# Altium PCB PCB_AIRPURE_2021-03-10.pcbdoc
Units mil, origin at the board's own origin, x right, y up, seen from the top; angles counter-clockwise.
Board outline 4947.01 x 4947.01 mil, 2 copper layers (Top Layer, Bottom Layer); 17 components, 13 nets, 107 pads, 2 vias.
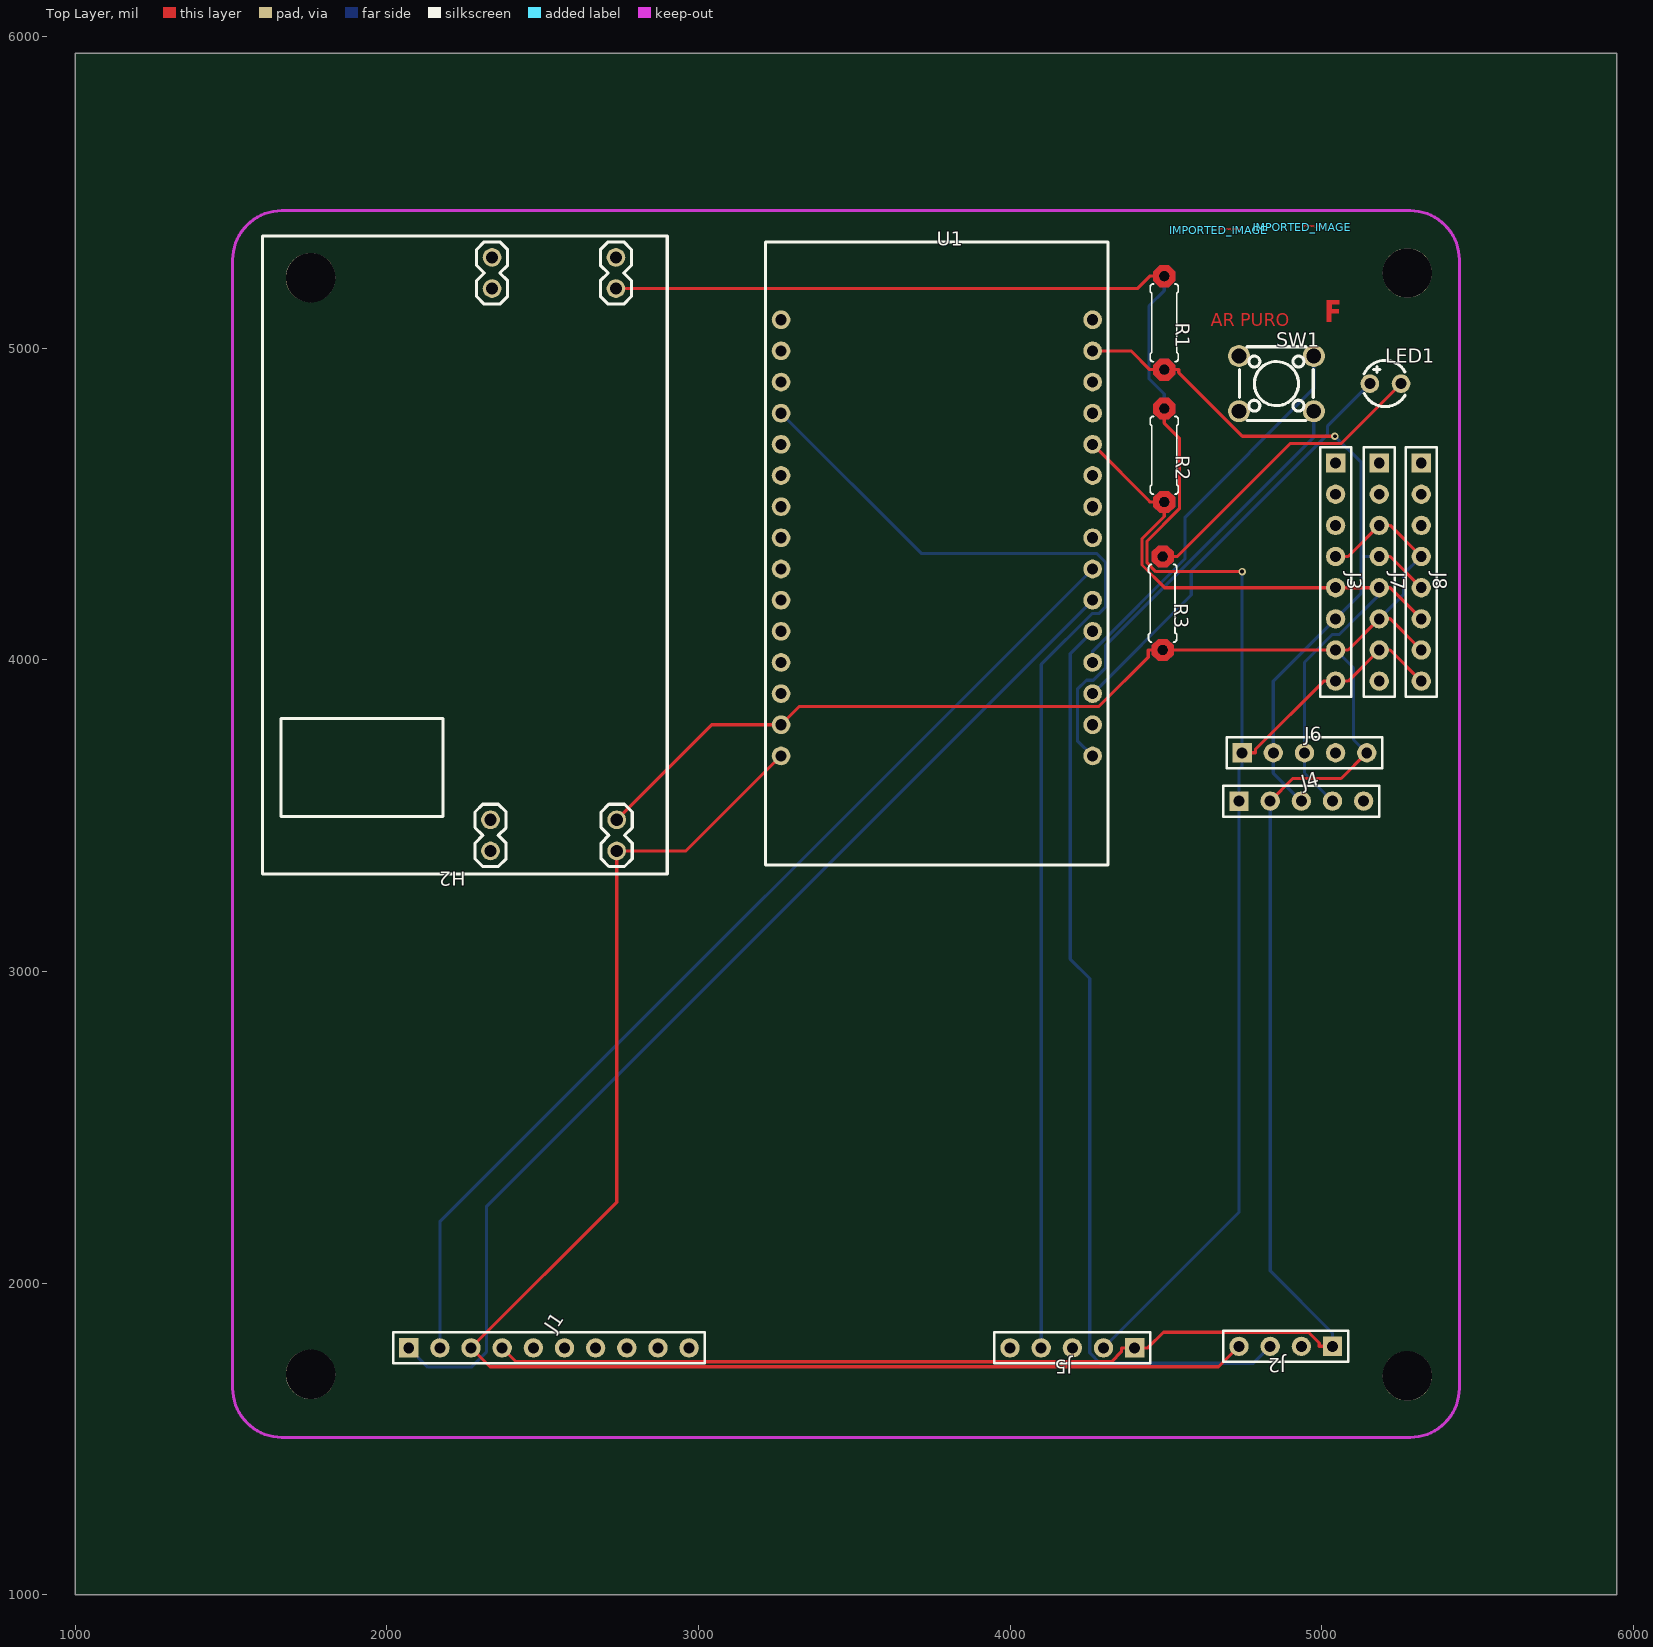
[diagram p0: Top Layer view]
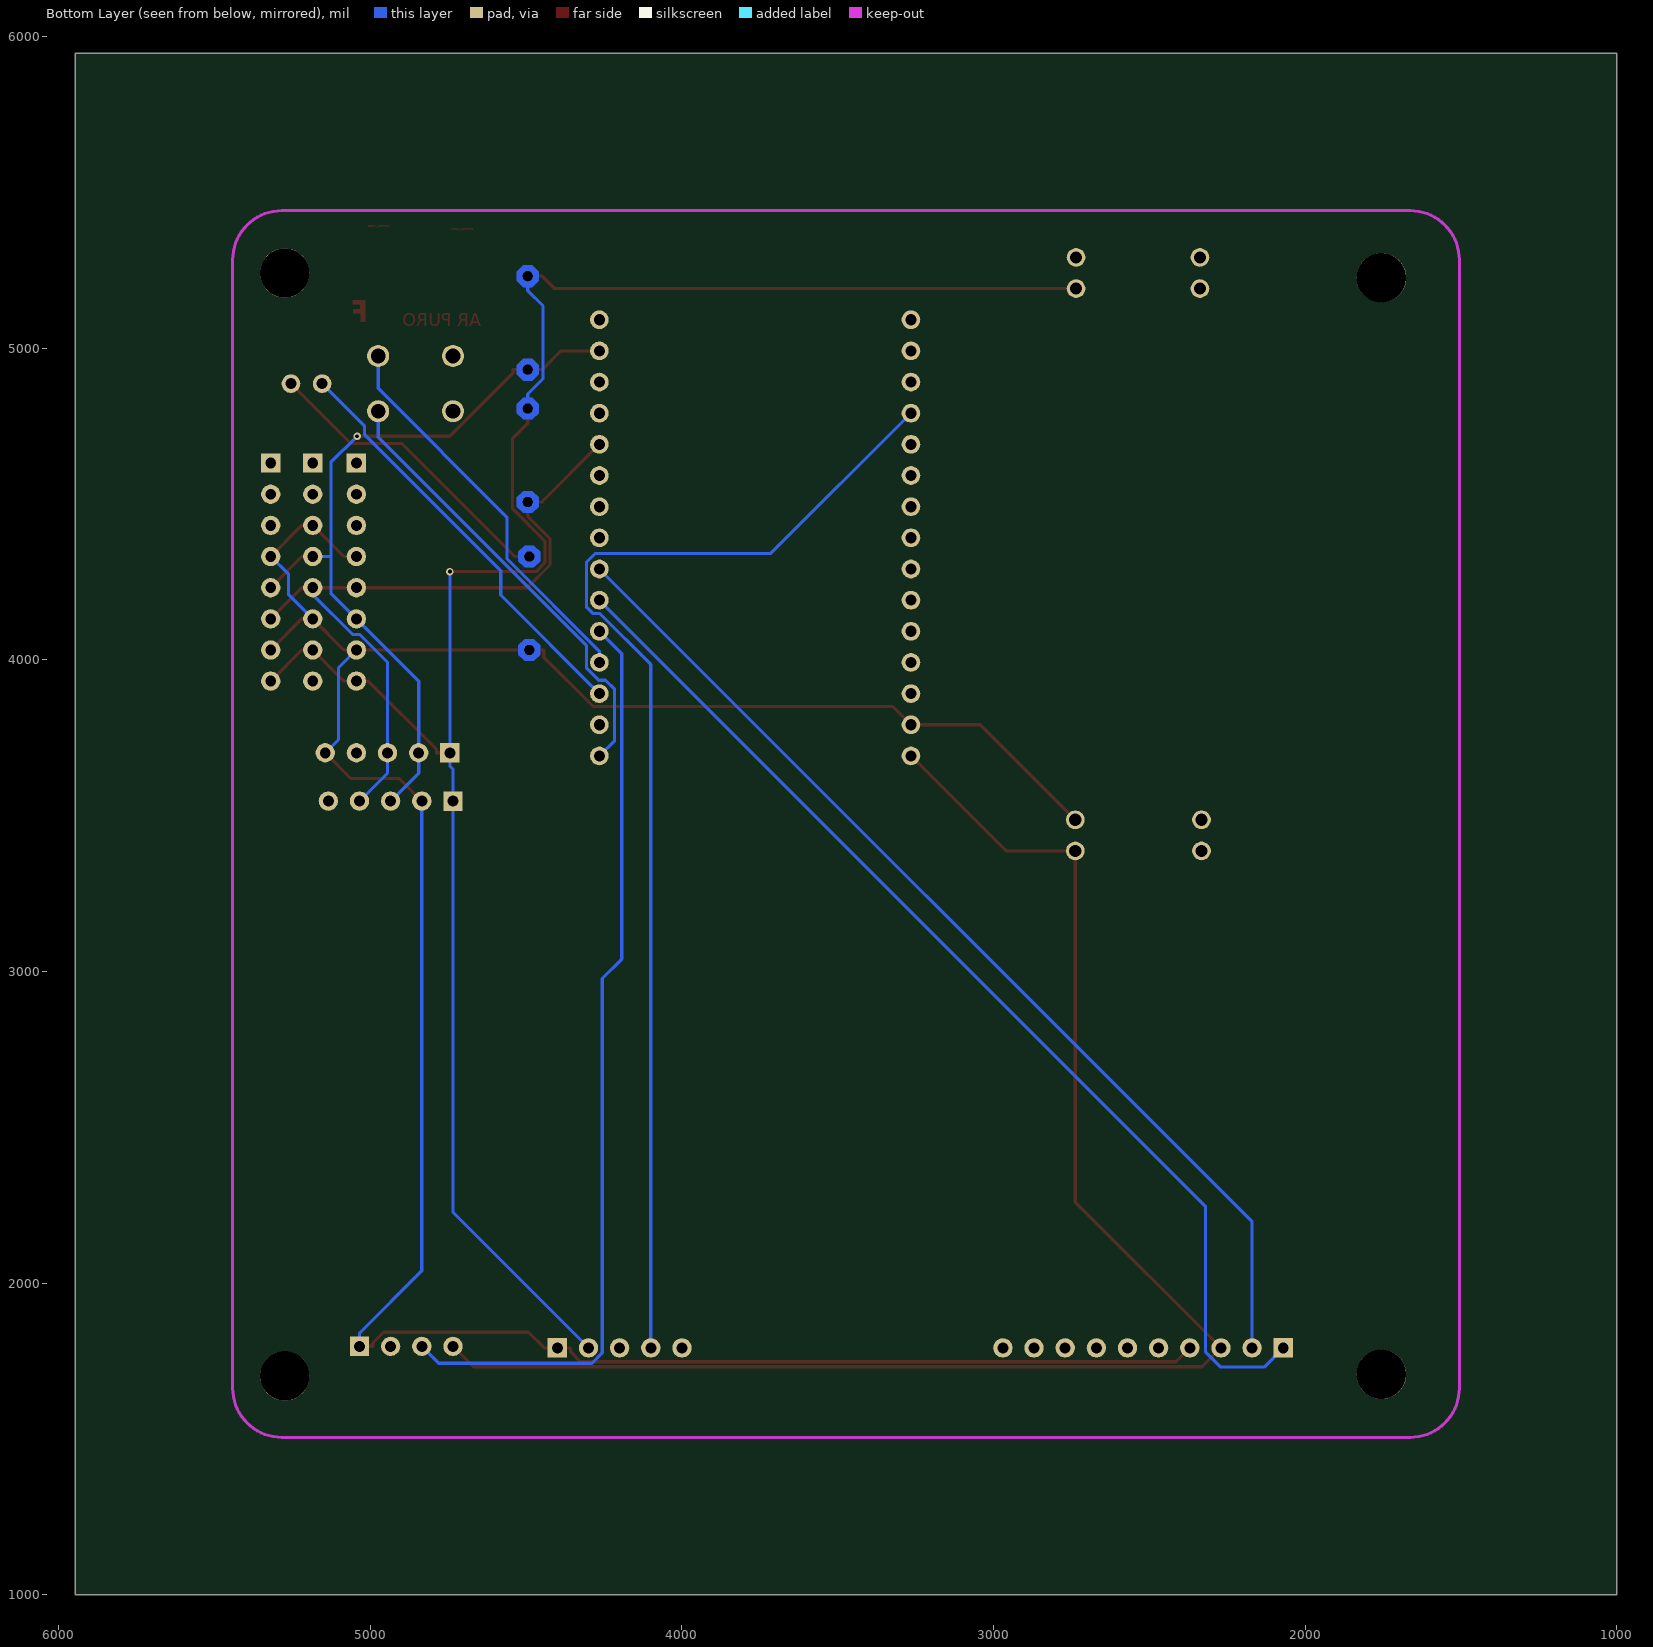
[diagram p1: Bottom Layer view, seen from below]

## Layer stack, top to bottom
Top Layer: signal copper (thickness not stored)
Dielectric: dielectric 12.6, FR-4, Dk 4.8
Bottom Layer: signal copper (thickness not stored)

## Board outline
5947.01,1000 1000,1000 1000,5947.01 5947.01,5947.01

## Components (designator, comment, footprint, x,y, rotation, side; value= is the part's Value field where it differs from the comment)
H2 "YwRobotPowerSupply" YWROBOT/545043 2635,3637.01 r180 top
IMPORTED_IMAGE "IMPORTED_IMAGE" IMPORTED_IMAGE#1 4669.69,5379.67 r0 top
IMPORTED_IMAGE "IMPORTED_IMAGE" IMPORTED_IMAGE#2 4938.68,5388.2 r0 top
J1 "HDR-M-2.54_1x10" HDR-M-2.54_1X10 2520,1792.01 r0 top
J2 "HDR-M-2.54_1x4" HDR-M-2.54_1X4 4885,1797.01 r180 top
J3 "HDR-M-2.54_1x8" HDR-M-2.54_1X8 5045,4232.01 r270 top
J4 "HDR-M-2.54_1x5" HDR-M-2.54_1X5 4935,3547.01 r0 top
J5 "HDR-M-2.54_1x5" HDR-M-2.54_1X5 4200,1792.01 r180 top
J6 "HDR-M-2.54_1x5" HDR-M-2.54_1X5 4945,3702.01 r0 top
J7 "HDR-M-2.54_1x8" HDR-M-2.54_1X8 5185,4232.01 r270 top
J8 "HDR-M-2.54_1x8" HDR-M-2.54_1X8 5320,4232.01 r270 top
LED1 "LED" LED-TH_BD3.8-P2.54-FD 5205,4887.01 r0 top
R1 "10K" RESISTOR_7.5MM_PTH 4495,5232.01 r270 top
R2 "10K" RESISTOR_7.5MM_PTH 4495,4807.01 r270 top
R3 "220" RESISTOR_7.5MM_PTH 4490,4332.01 r270 top
SW1 "Button-6x6x6mm" SW-TH_4P-L6.0-W6.0-P4.50-LS6.1 4855,4887.01 r0 top
U1 "ESP32 DEVKIT" ESP32_DEVKIT_MELIFE 3215,3342.01 r0 top

## Footprints (in the part's own frame and the unit in brackets; to place one, negate y for a bottom-side part, rotate by r counter-clockwise, add the part's x,y. Pads: shape width x height; smd on the part's side, far side on the other; paste and mask are expansions set on the pad)
ESP32_DEVKIT_MELIFE [mil]
  round 60 hole 36: 1(50,350) 2(50,450) 3(50,550) 4(50,650) 5(50,750) 6(50,850) 7(50,950) 8(50,1050) 9(50,1150) 10(50,1250) 11(50,1350) 12(50,1450) 13(50,1550) 14(50,1650) 15(50,1750) 16(1050,350) 17(1050,450) 18(1050,550) 19(1050,650) 20(1050,750) 21(1050,850) 22(1050,950) 23(1050,1050) 24(1050,1150) 25(1050,1250) 26(1050,1350) 27(1050,1450) 28(1050,1550) 29(1050,1650) 30(1050,1750)
  silkscreen extent 0,0 1100,2000
HDR-M-2.54_1X4 [mil]
  rect 62x62 hole 35: 1(-150,0)
  round 62 hole 35: 2(-50,0) 3(50,0) 4(150,0)
  silkscreen extent -200,-50 200,50
HDR-M-2.54_1X5 [mil]
  rect 62x62 hole 35: 1(-200,0)
  round 62 hole 35: 2(-100,0) 3(0,0) 4(100,0) 5(200,0)
  silkscreen extent -250,-50 250,50
HDR-M-2.54_1X8 [mil]
  rect 62x62 hole 35: 1(-400,0)
  round 62 hole 35: 2(-300,0) 3(-200,0) 4(-100,0) 5(0,0) 6(100,0) 7(200,0) 8(300,0)
  silkscreen extent -450,-50 350,50
HDR-M-2.54_1X10 [mil]
  rect 62x62 hole 35: 1(-450,0)
  round 62 hole 35: 2(-350,0) 3(-250,0) 4(-150,0) 5(-50,0) 6(50,0) 7(150,0) 8(250,0) 9(350,0) 10(450,0)
  silkscreen extent -500,-50 500,50
IMPORTED_IMAGE#1 [mil]
IMPORTED_IMAGE#2 [mil]
  Top Layer region: 92.62,-288.42 92.62,-301.97 77.96,-301.97 77.96,-234.23 117.94,-234.23 117.94,-246.32 93.29,-247.1 93.29,-262 116.61,-262.79 116.61,-274.87 92.62,-274.87
LED-TH_BD3.8-P2.54-FD [mil]
  round 60 hole 35.43: 1(-50,0) 2(50,0)
  silkscreen extent -68,-74 63,74
RESISTOR_7.5MM_PTH [mil]
  round 0 hole 31.5 slot 31.7 at 0 deg: 1(0,0) 2(300,0)
  Top Layer region: 35.11,14.54 14.54,35.11 -14.54,35.11 -35.11,14.54 -35.11,-14.54 -14.54,-35.11 14.54,-35.11 35.11,-14.54
  Top Layer region: 335.11,14.54 314.54,35.11 285.46,35.11 264.89,14.54 264.89,-14.54 285.46,-35.11 314.54,-35.11 335.11,-14.54
  Bottom Layer region: 35.11,14.54 14.54,35.11 -14.54,35.11 -35.11,14.54 -35.11,-14.54 -14.54,-35.11 14.54,-35.11 35.11,-14.54
  Bottom Layer region: 335.11,14.54 314.54,35.11 285.46,35.11 264.89,14.54 264.89,-14.54 285.46,-35.11 314.54,-35.11 335.11,-14.54
  silkscreen extent 25,-45 275,45
SW-TH_4P-L6.0-W6.0-P4.50-LS6.1 [mm]
  round 1.8 hole 1.2: 1(-3.05,2.25) 2(3.05,2.25) 3(-3.05,-2.25) 4(3.05,-2.25)
  silkscreen extent -3,-3 3,3
YWROBOT/545043 [mil]
  round 60 hole 39.37: 1(-102.5,250) 2(-102.5,150) 3(302.5,250) 4(302.5,150) 5(-100,-1555) 6(-100,-1655) 7(297.5,-1555) 8(297.5,-1655)
  silkscreen extent -265,-1724 1035,324

## Free pads (board coordinates)
  round 158.74 hole 158.74 unplated: ""(1755,1707.01) ""(1755,5227.01) ""(5275,1702.01) ""(5275,5242.01)

## Via types
v1: diameter 24.02, hole 12.2, Top Layer to Bottom Layer, 2 vias

## Nets (pads, with @x,y where several pads share a name; then routed paths per layer and width w, separated by ;. In a path a pad name is that pad's centre, name@x,y a point inside that pad or via, vN(x,y) a via of type N, cw(c..) or ccw(c..) an arc to the next point about the centre after c; other vN are vias at no path point)
3.3V: H2.5 J3.8 J4.1 J5.2 J6.1 J7.7 J8.8 R1.1 R2.1 | length 6552.3
  Top Layer w10.24: H2.5 4408.4,5192.01 4448.4,5232.01 R1.1 ; R2.1 4495,4760.41 4543.6,4711.81 4543.6,4485.41 4440.1,4381.91 4440.1,4311.61 4468,4283.61 v1(4745,4283.61) ; J6.1 4787.5,3702.01 4787.5,3712.61 5006.9,3932.01 J3.8 5085,3932.01 J7.7 5220,4032.01 J8.8
  Bottom Layer w10.24: J5.2 4735,2227.01 J4.1 4735,3649.51 4745,3659.51 4745,3680.71 J6.1 v1(4745,4283.61) ; R2.1 4495,4853.61 4446,4902.61 4446,5136.41 4495,5185.41 R1.1
5V: H2.1 J1.3 J2.4 U1.1 | length 4959.9
  Top Layer w10.24: U1.1 2960,3387.01 H2.1 2737.5,2259.51 J1.3 2330.8,1731.21 4669.2,1731.21 J2.4
33V: SW1.4 U1.16 | length 1453.7
  Bottom Layer w10.24: U1.16 4216.3,3740.71 4216.3,3905.91 4245.4,3935.11 4267.4,3935.11 4306.8,3974.61 4306.8,4046.91 4975.1,4715.11 SW1.4
BUTTON: SW1.2 U1.19 | length 1277.8
  Bottom Layer w10.24: U1.19 4265,4028.61 4561.9,4325.51 4561.9,4458.41 4975.1,4871.51 SW1.2
GND: H2.2 J1.4 J2.1 J3.4 J3.7 J4.2 J5.1 J6.5 J7.3 J7.6 J8.4 J8.7 R3.2 U1.2 | length 8851.6
  Top Layer w10.24: J1.4 2414.2,1747.81 4325.9,1747.81 4357.5,1779.41 4357.5,1792.01 J5.1 4442.5,1792.01 4492.6,1842.11 4958,1842.11 4992.5,1807.61 4992.5,1797.01 J2.1 ; H2.2 3042.5,3792.01 U1.2 3323.5,3850.51 4285.2,3850.51 4443.4,4008.71 4443.4,4032.01 R3.2 J3.7 5085,4032.01 J7.6 5220,4132.01 J8.7 ; J4.2 4907.5,3619.51 5062.5,3619.51 J6.5 ; J3.4 5085,4332.01 J7.3 5220,4432.01 J8.4
  Bottom Layer w10.24: J4.2 4835,2039.51 5035,1839.51 J2.1 ; J3.7 5102.5,3974.51 5102.5,3744.51 J6.5 ; J7.6 5262.5,4209.51 5262.5,4274.51 J8.4
LED1_2: LED1.2 R3.1 | length 994.9
  Top Layer w10.24: R3.1 4536.6,4332.01 4899.4,4694.81 5062.8,4694.81 LED1.2
LED_ESP: LED1.1 U1.18 | length 1363.7
  Bottom Layer w10.24: U1.18 4581.4,4208.41 4581.4,4286.31 5019.2,4724.01 5019.2,4751.11 LED1.1
RX2: J1.1 U1.21 | length 3513.6
  Bottom Layer w10.24: J1.1 2131.5,1730.51 2270.4,1730.51 2320,1780.11 2320,2247.01 U1.21
SCL: J3.6 J4.3 J6.2 J7.4 J8.5 R1.2 U1.29 | length 2491.5
  Top Layer w10.24: U1.29 4388.4,4992.01 4448.4,4932.01 R1.2 4541.6,4932.01 4541.6,4922.31 4745.7,4718.31 v1(5042.7,4718.31) ; J7.4 5220,4332.01 J8.5
  Bottom Layer w10.24: J4.3 4845,3637.01 J6.2 4845,3932.01 J3.6 5126.7,4213.61 5126.7,4332.01 ; v1(5042.7,4718.31) 5126.7,4634.31 5126.7,4332.01 ; J7.4 5126.7,4332.01
SDA: J3.5 J4.4 J6.3 J7.5 J8.6 R2.2 U1.26 | length 2342.5
  Top Layer w10.24: U1.26 4448.4,4508.61 4448.4,4507.01 R2.2 4495,4460.41 4423.4,4388.81 4423.4,4304.71 4496.1,4232.01 J3.5 J7.5 5220,4232.01 J8.6
  Bottom Layer w10.24: J4.4 4945,3637.01 J6.3 4945,3992.11 5034.9,4082.01 5057.4,4082.01 5185,4209.61 J7.5
TX2: J1.2 U1.22 | length 3367.8
  Bottom Layer w10.24: J1.2 2170,2197.01 U1.22
VOUT_DHT: J2.3 U1.20 | length 2986.6
  Bottom Layer w10.24: U1.20 4193.5,4020.51 4193.5,3039.91 4255.9,2977.51 4255.9,1776.01 4288.9,1743.01 4781,1743.01 J2.3
VOUT_MAX: J5.4 U1.12 | length 3859.4
  Bottom Layer w10.24: U1.12 3715,4342.01 4277.5,4342.01 4306.8,4312.71 4306.8,4170.81 4284.8,4148.91 4263.2,4148.91 4100,3985.71 J5.4
pads on no net: H2.3 H2.4 H2.6 H2.7 H2.8 J1.5 J1.6 J1.7 J1.8 J1.9 J1.10 J2.2 J3.1 J3.2 J3.3 J4.5 J5.3 J5.5 J6.4 J7.1 J7.2 J7.8 J8.1 J8.2 J8.3 SW1.1 SW1.3 U1.3 U1.4 U1.5 U1.6 U1.7 U1.8 U1.9 U1.10 U1.11 U1.13 U1.14 U1.15 U1.17 U1.23 U1.24 U1.25 U1.27 U1.28 U1.30

## Keep-outs
Keep-Out Layer:
  lines w10: 1505,1662.48 ccw(c1662.48,1662.48) 1662.48,1505 ; 1505,5284.53 cw(c1662.48,5284.53) 1662.48,5442.01 ; 5284.53,1505 ccw(c5284.53,1662.48) 5442.01,1662.48 ; 5284.53,5442.01 cw(c5284.53,5284.53) 5442.01,5284.53

## Other copper
Top Layer:
  text "AR PURO" at 4645,5071.69 h40.63